# Altium PCB PCB_AgOpenGPS_RTU_2020-12-27_17-55-25.pcbdoc
Units mm, origin at the board's own origin, x right, y up, seen from the top; angles counter-clockwise.
Board outline 75.69 x 91.83 mm, 2 copper layers (Top Layer, Bottom Layer); 9 components, 26 nets, 99 pads, 4 vias.
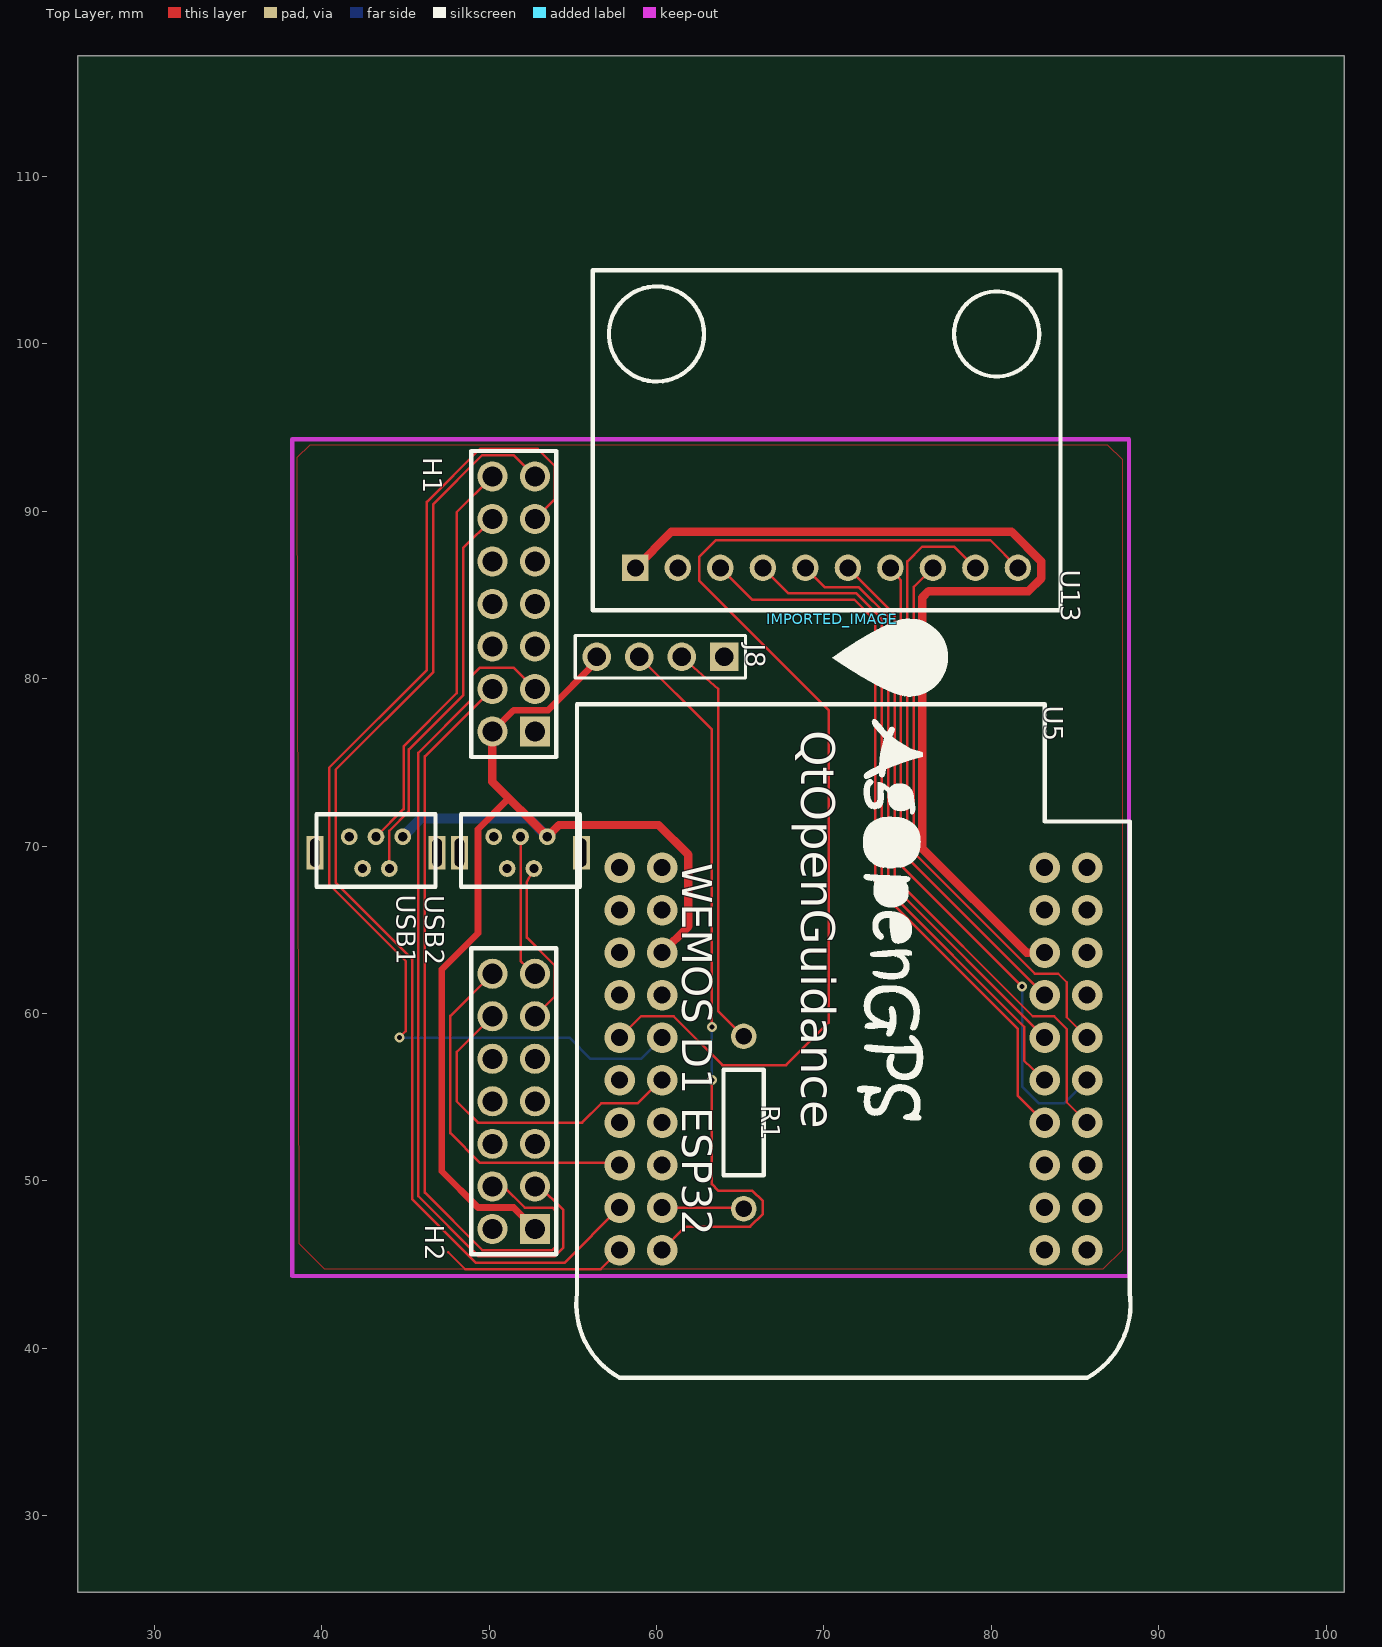
[diagram p0: Top Layer view]
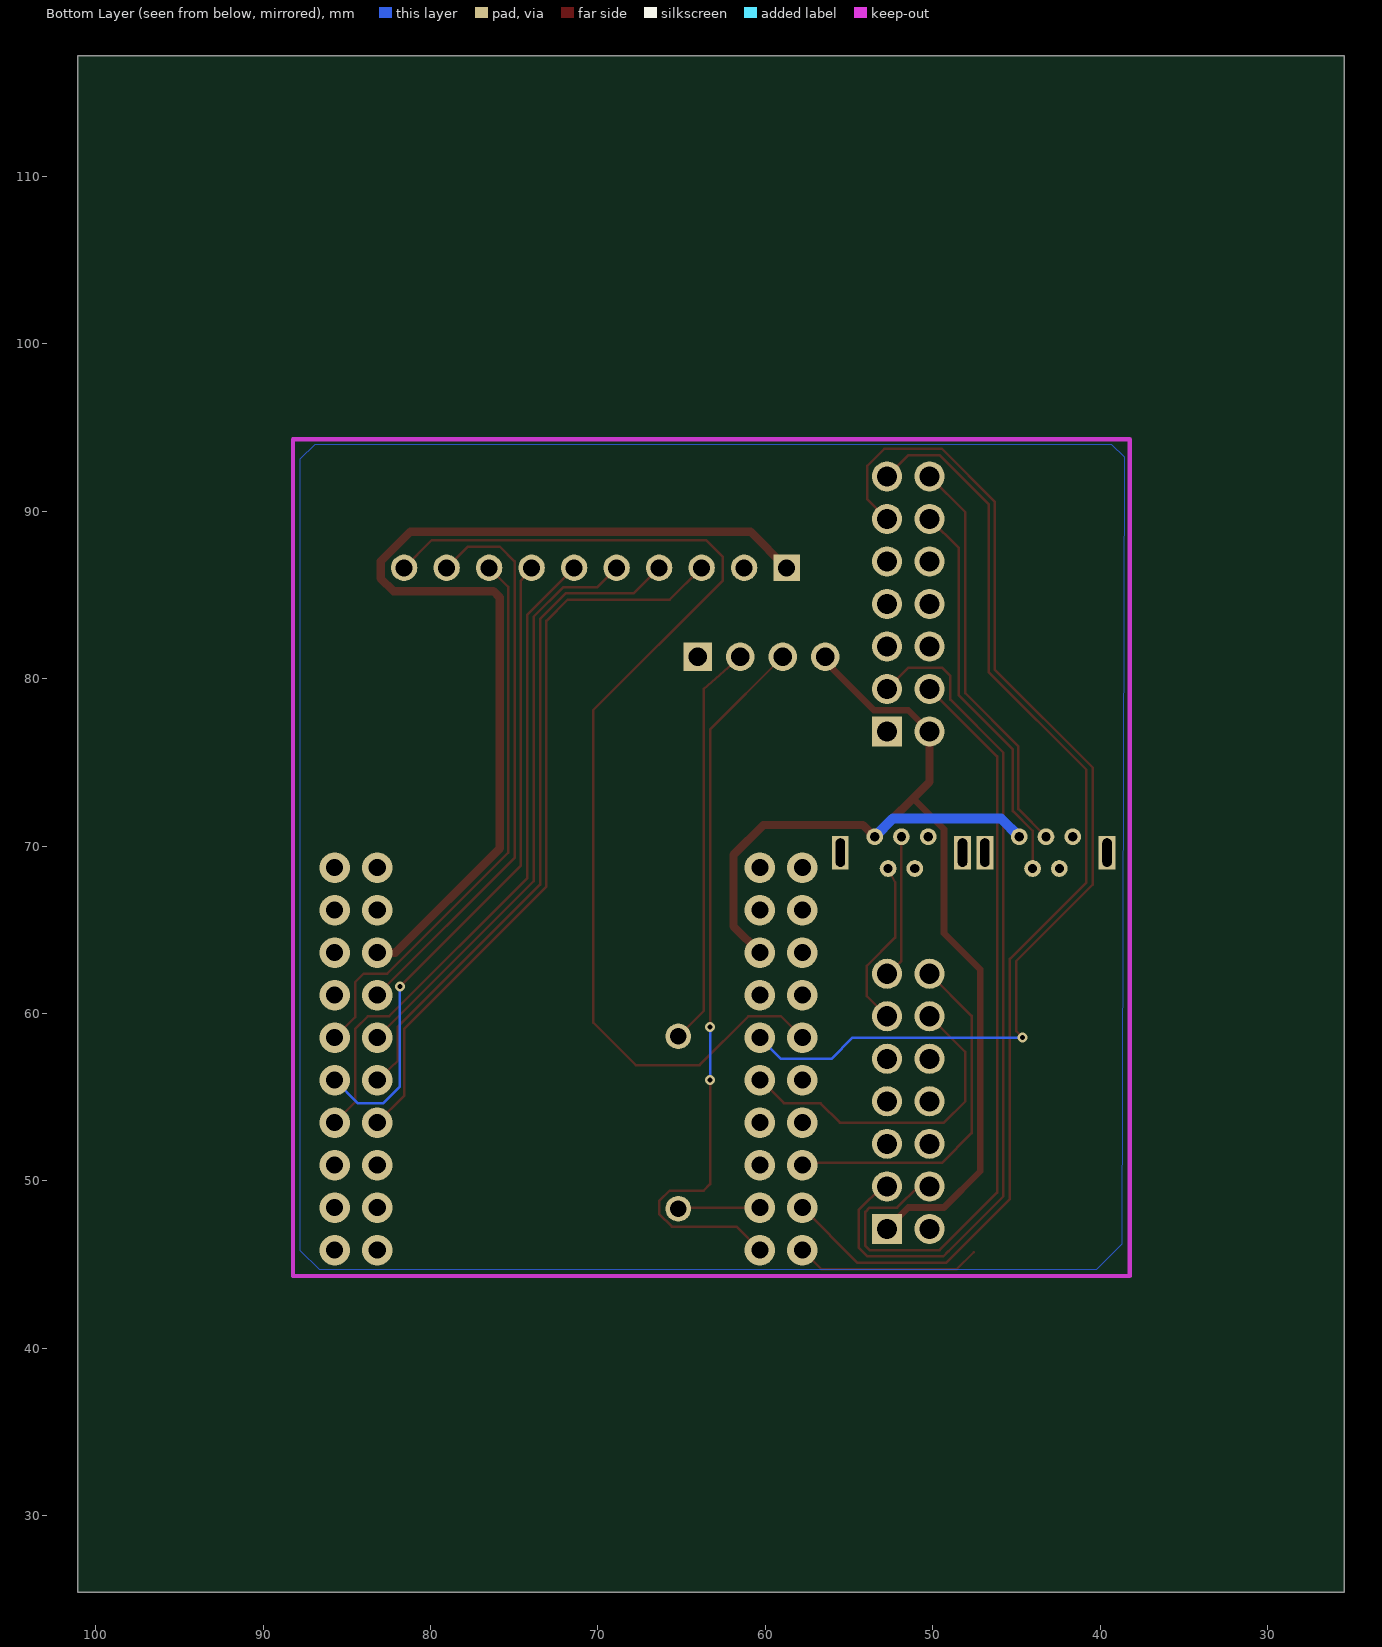
[diagram p1: Bottom Layer view, seen from below]

## Layer stack, top to bottom
Top Layer: signal copper (thickness not stored)
Dielectric: dielectric 0.32, FR-4, Dk 4.8
Bottom Layer: signal copper (thickness not stored)

## Board outline
101.095,25.4 25.4,25.4 25.4,117.23 101.095,117.23

## Components (designator, comment, footprint, x,y, rotation, side; value= is the part's Value field where it differs from the comment)
H1 "A2541WV-2X7P" HDR-TH_14P-P2.54-V-R2-C7-S2.54_A2541WV-2X7P 51.458,84.464 r90 top
H2 "A2541WV-2X7P" HDR-TH_14P-P2.54-V-R2-C7-S2.54_A2541WV-2X7P 51.458,54.746 r90 top
IMPORTED_IMAGE "IMPORTED_IMAGE" IMPORTED_IMAGE 70.48,83.562 r0 top
J8 "A2541WV-4P" HDR-TH_4P-P2.54-V 60.228,81.307 r180 top
R1 "10K" RES-TH_BD2.4-L6.3-P10.30-D0.6 65.202,53.476 r90 top
U5 "TG_WEMOS_D1_ESP32(CLONE)" "WEMOS-D1 ESP32" 85.728,43.307 r180 top
U13 "GY-BNO08X" GY-BNO08X 71.425,94.243 r90 top
USB1 "USB-MINI-6.9X10.H-H3.9-DIP-V" MINI-USB-TH_C13453 43.231,69.605 r180 top
USB2 "USB-MINI-6.9X10.H-H3.9-DIP-V" MINI-USB-TH_C13453 51.867,69.605 r180 top

## Footprints (in the part's own frame and the unit in brackets; to place one, negate y for a bottom-side part, rotate by r counter-clockwise, add the part's x,y. Pads: shape width x height; smd on the part's side, far side on the other; paste and mask are expansions set on the pad)
GY-BNO08X [mil]
  rect 62x62 hole 40.16: 1(-300,500)
  round 62 hole 40.16: 2(-300,400) 3(-300,300) 4(-300,200) 4(-300,200) 5(-300,100) 6(-300,0) 7(-300,-100) 8(-300,-200) 9(-300,-300) 10(-300,-400)
  silkscreen extent -400,-500 400,600
HDR-TH_4P-P2.54-V [mm]
  rect 1.7x1.7 hole 1.1: 1(-3.81,0)
  round 1.7 hole 1.1: 2(-1.27,0) 3(1.27,0) 4(3.81,0)
  silkscreen extent -5.08,-1.27 5.08,1.27
HDR-TH_14P-P2.54-V-R2-C7-S2.54_A2541WV-2X7P [mm]
  rect 1.8x1.8 hole 1.2: 1(-7.62,-1.27)
  round 1.8 hole 1.2: 2(-7.62,1.27) 3(-5.08,-1.27) 4(-5.08,1.27) 5(-2.54,-1.27) 6(-2.54,1.27) 7(0,-1.27) 8(0,1.27) 9(2.54,-1.27) 10(2.54,1.27) 11(5.08,-1.27) 12(5.08,1.27) 13(7.62,-1.27) 14(7.62,1.27)
  silkscreen extent -9.14,-2.54 9.14,2.54
IMPORTED_IMAGE [mm]
  silkscreen extent 0,-29.95 6.92,0
MINI-USB-TH_C13453 [mm]
  round 1 hole 0.55: 1(-1.6,-0.95) 2(-0.8,0.95) 3(0,-0.95) 4(0.8,0.95) 5(1.6,-0.95)
  rect 1x2 hole 0.55 slot 1.7 at 90 deg: 6(3.65,0) 7(-3.65,0)
  silkscreen extent -3.56,-2.29 3.56,2.03
RES-TH_BD2.4-L6.3-P10.30-D0.6 [mm]
  round 1.524 hole 1: 1(-5.15,0) 2(5.15,0)
  silkscreen extent -3.15,-1.2 3.15,1.2
"WEMOS-D1 ESP32" [mil]
  round 72 hole 40: 1(0,-100) 2(100,-100) 3(1000,-100) 4(1100,-100) 5(0,-200) 6(100,-200) 7(1000,-200) 8(1100,-200) 9(0,-300) 10(100,-300) 11(1000,-300) 12(1100,-300) 13(0,-400) 14(100,-400) 15(1000,-400) 16(1100,-400) 17(0,-500) 18(100,-500) 19(1000,-500) 20(1100,-500) 21(0,-600) 22(100,-600) 23(1000,-600) 24(1100,-600) 25(0,-700) 26(100,-700) 27(1000,-700) 28(1100,-700) 29(0,-800) 30(100,-800) 31(1000,-800) 32(1100,-800) 33(0,-900) 34(100,-900) 35(1000,-900) 36(1100,-900) 37(0,-1000) 38(1000,-1000) 39(100,-1000) 40(1100,-1000)
  silkscreen extent -102,-1384 1202,200

## Via types
v1: diameter 0.6, hole 0.3, Top Layer to Bottom Layer, 4 vias

## Nets (pads, with @x,y where several pads share a name; then routed paths per layer and width w, separated by ;. In a path a pad name is that pad's centre, name@x,y a point inside that pad or via, vN(x,y) a via of type N, cw(c..) or ccw(c..) an arc to the next point about the centre after c; other vN are vias at no path point)
+3V3: U5.30 U13.1 | length 59.4
  Top Layer w0.5: U13.1 60.884,88.782 81.204,88.782 82.982,87.004 82.982,85.988 82.22,85.226 76.251,85.226 75.87,84.845 75.87,69.859 82.103,63.628 U5.30@83.188,63.628
+5V: H1.2 H2.1 J8.4 U5.31 USB1.1 USB2.1 | length 72.3
  Top Layer w0.4: H1.2 51.458,78.114 53.518,78.114 56.418,81.015 J8.4 ; 51.188,72.833 51.158,72.833 49.327,71.002 49.327,64.788 47.158,62.62 47.158,50.565 49.327,48.396 51.458,48.396 H2.1
  Top Layer w0.5: H1.2 50.188,73.834 USB2.1 54.168,71.256 60.122,71.256 61.9,69.478 61.9,65.198 U5.31@60.328,63.636
  Bottom Layer w0.6: USB1.1 45.913,71.637 52.385,71.637 USB2.1
F9P'_1>2: H1.3 H2.3 | length 52.2
  Top Layer w0.15: 49.051,45.791 49.367,45.475 ; H2.3 53.01,49.666 54.407,48.269 54.407,45.983 53.899,45.475 49.367,45.475 ; H1.3 51.458,80.654 49.454,80.654 48.946,80.146 48.946,78.749 45.771,75.574 45.771,49.072 49.367,45.475
F9P_2'>1: H1.4 H2.4 | length 47.7
  Top Layer w0.15: H2.4 50.851,49.666 52.121,48.396 53.772,48.396 54.026,48.142 54.026,46.11 53.772,45.856 49.581,45.856 46.152,49.285 46.152,65.033 46.152,65.541 46.152,75.348 H1.4
GND: H1.1 H2.2 J8.1 U5.1 U5.4 U5.27 U13.2 USB1.5 USB1.6 USB1.7 USB2.5 USB2.6 USB2.7 | length 11.1
  Top Layer w0.15: 47.549,45.729 48.565,44.713 56.655,44.713 U5.4
IMU_CS: U5.13 U13.6 | length 39.8
  Top Layer w0.15: U13.6 74.219,83.829 74.219,68.081 82.474,59.826 83.744,59.826 84.506,59.064 84.506,54.69 U5.13@85.728,53.468
IMU_INT: U5.17 U13.7 | length 39.1
  Top Layer w0.15: U13.7 74.6,85.861 74.6,68.843 v1(81.839,61.604)
  Bottom Layer w0.15: v1(81.839,61.604) 81.839,55.635 82.855,54.619 84.34,54.619 U5.17
IMU_RES: U5.21 U13.8 | length 33.7
  Top Layer w0.15: U13.8 75.362,85.48 75.362,69.605 82.601,62.366 83.998,62.366 84.506,61.858 84.506,59.77 U5.21@85.728,58.548
J8_2: J8.2 R1.2 | length 24.3
  Top Layer w0.15: J8.2 63.678,79.384 63.678,60.15 R1.2
MOSI: U5.22 U13.5 | length 35.2
  Top Layer w0.15: U13.5 70.038,85.47 72.07,85.47 73.838,83.702 73.838,67.898 U5.22@83.188,58.548
PS0: U5.24 U13.10 | length 66.5
  Top Layer w0.15: U5.24@57.788,58.548 59.068,59.826 61.011,59.826 63.932,56.905 67.742,56.905 70.282,59.445 70.282,78.114 62.535,85.861 62.535,87.258 63.551,88.274 79.934,88.274 U13.10
PS1: U5.26 U13.9 | length 34.3
  Top Layer w0.15: U13.9 77.775,87.893 75.87,87.893 74.981,87.004 74.981,69.295 U5.26@83.188,61.088
RX/SCLK: U5.14 U13.3 | length 44.8
  Top Layer w0.15: U13.3 65.71,84.718 71.806,84.718 73.076,83.448 73.076,67.573 81.585,59.064 81.585,55.071 U5.14@83.188,53.468
RXD: R1.1 U5.7 | length 4.9
  Top Layer w0.15: U5.7 65.141,48.387 R1.1
RXD1: H1.11 U5.23 | length 66.2
  Top Layer w0.15: v1(44.628,58.556) 45.009,58.937 45.009,63.128 40.437,67.7 40.437,74.685 46.279,80.527 46.279,90.56 49.454,93.735 52.883,93.735 53.899,92.719 53.899,90.715 H1.11
  Bottom Layer w0.15: v1(44.628,58.556) 54.788,58.556 56.058,57.286 59.067,57.286 U5.23
RXD2: H2.12 U5.19 | length 19.9
  Top Layer w0.15: H2.12 48.057,57.695 48.057,54.746 49.327,53.476 55.55,53.476 56.693,54.619 58.885,54.619 58.852,54.619 60.249,56.008 U5.19@60.328,56.008
S$6: 
S$8: 
TX/MISO: U5.18 U13.4 | length 40
  Top Layer w0.15: U13.4@66.345,86.623 67.869,85.099 71.933,85.099 73.457,83.575 73.457,67.7 81.966,59.191 81.966,57.159 U5.18@83.188,56.008
TXD: J8.3 U5.3 | length 44.5
  Top Layer w0.15: J8.3 63.297,76.968 63.297,62.747 v1(63.297,59.191) ; U5.3@60.328,45.848 61.735,47.253 65.583,47.253 66.345,48.015 66.345,48.777 65.71,49.412 63.678,49.412 63.297,49.793 v1(63.297,56.016)
  Bottom Layer w0.15: v1(63.297,56.016) v1(63.297,59.191)
TXD1: H1.13 U5.8 | length 69
  Top Layer w0.15: H1.13 51.458,93.354 49.581,93.354 46.66,90.433 46.66,80.4 40.818,74.558 40.818,67.827 45.39,63.255 45.39,48.904 49.2,45.094 54.496,45.094 U5.8@57.788,48.388
TXD2: H2.14 U5.12 | length 21.5
  Top Layer w0.15: H2.14 47.676,59.854 47.676,52.841 49.454,51.063 57.652,51.063 U5.12
USB_D+1: H1.14 USB1.3 | length 24.4
  Top Layer w0.15: USB1.3 44.882,72.206 44.882,75.955 48.057,79.13 48.057,89.953 H1.14
USB_D+2: H2.13 USB2.3 | length 8.6
  Top Layer w0.15: USB2.3 51.867,63.128 52.149,62.846 52.248,62.846 H2.13
USB_D-1: H1.12 USB1.2 | length 23.4
  Top Layer w0.15: USB1.2 44.031,70.913 45.202,72.084 45.202,75.767 48.438,79.003 48.438,87.794 H1.12
USB_D-2: H2.11 USB2.2 | length 10.1
  Top Layer w0.15: USB2.2 52.248,67.827 52.248,64.525 53.927,62.846 53.927,61.025 H2.11
pads on no net: H1.5 H1.6 H1.7 H1.8 H1.9 H1.10 H2.5 H2.6 H2.7 H2.8 H2.9 H2.10 U5.2 U5.5 U5.6 U5.9 U5.10 U5.11 U5.15 U5.16 U5.20 U5.25 U5.28 U5.29 U5.32 U5.33 U5.34 U5.35 U5.36 U5.37 U5.38 U5.39 U5.40 USB1.4 USB2.4

## Polygon pours and split planes (outlines as drawn)
GND on Bottom Layer (solid): 38.532,93.227 39.294,93.989 41.961,93.989 86.919,93.989 87.808,93.1 87.808,45.856 86.665,44.713 40.183,44.713 38.659,46.237
GND on Top Layer (solid): 38.532,93.227 39.294,93.989 86.919,93.989 87.808,93.1 87.808,91.195 87.808,45.856 86.665,44.713 40.183,44.713 38.659,46.237

## Silkscreen, mask and mechanical layers (free items; w line width, h text height)
Top Overlay:
  text "QtOpenGuidance" at 68.649,76.926 h2.03 r270
Document:
  lines w0.003: 63.222,71.29 63.273,71.34

## Text inside footprints (layer, text, board x,y; h text height)
U5: Top Overlay "WEMOS D1 ESP32" at 61.519,68.97 h1.78 r270